# Altium PCB DC_Switch_2_5V.PcbDoc (part 2 of 2)
Units mm, origin at the board's own origin, x right, y up, seen from the top; angles counter-clockwise.
Board outline 119.38 x 91.44 mm, 2 copper layers (Top Layer, Bottom Layer); 24 components, 104 nets, 306 pads, 149 vias.
Unrouted connection lines stored in the file: 1.
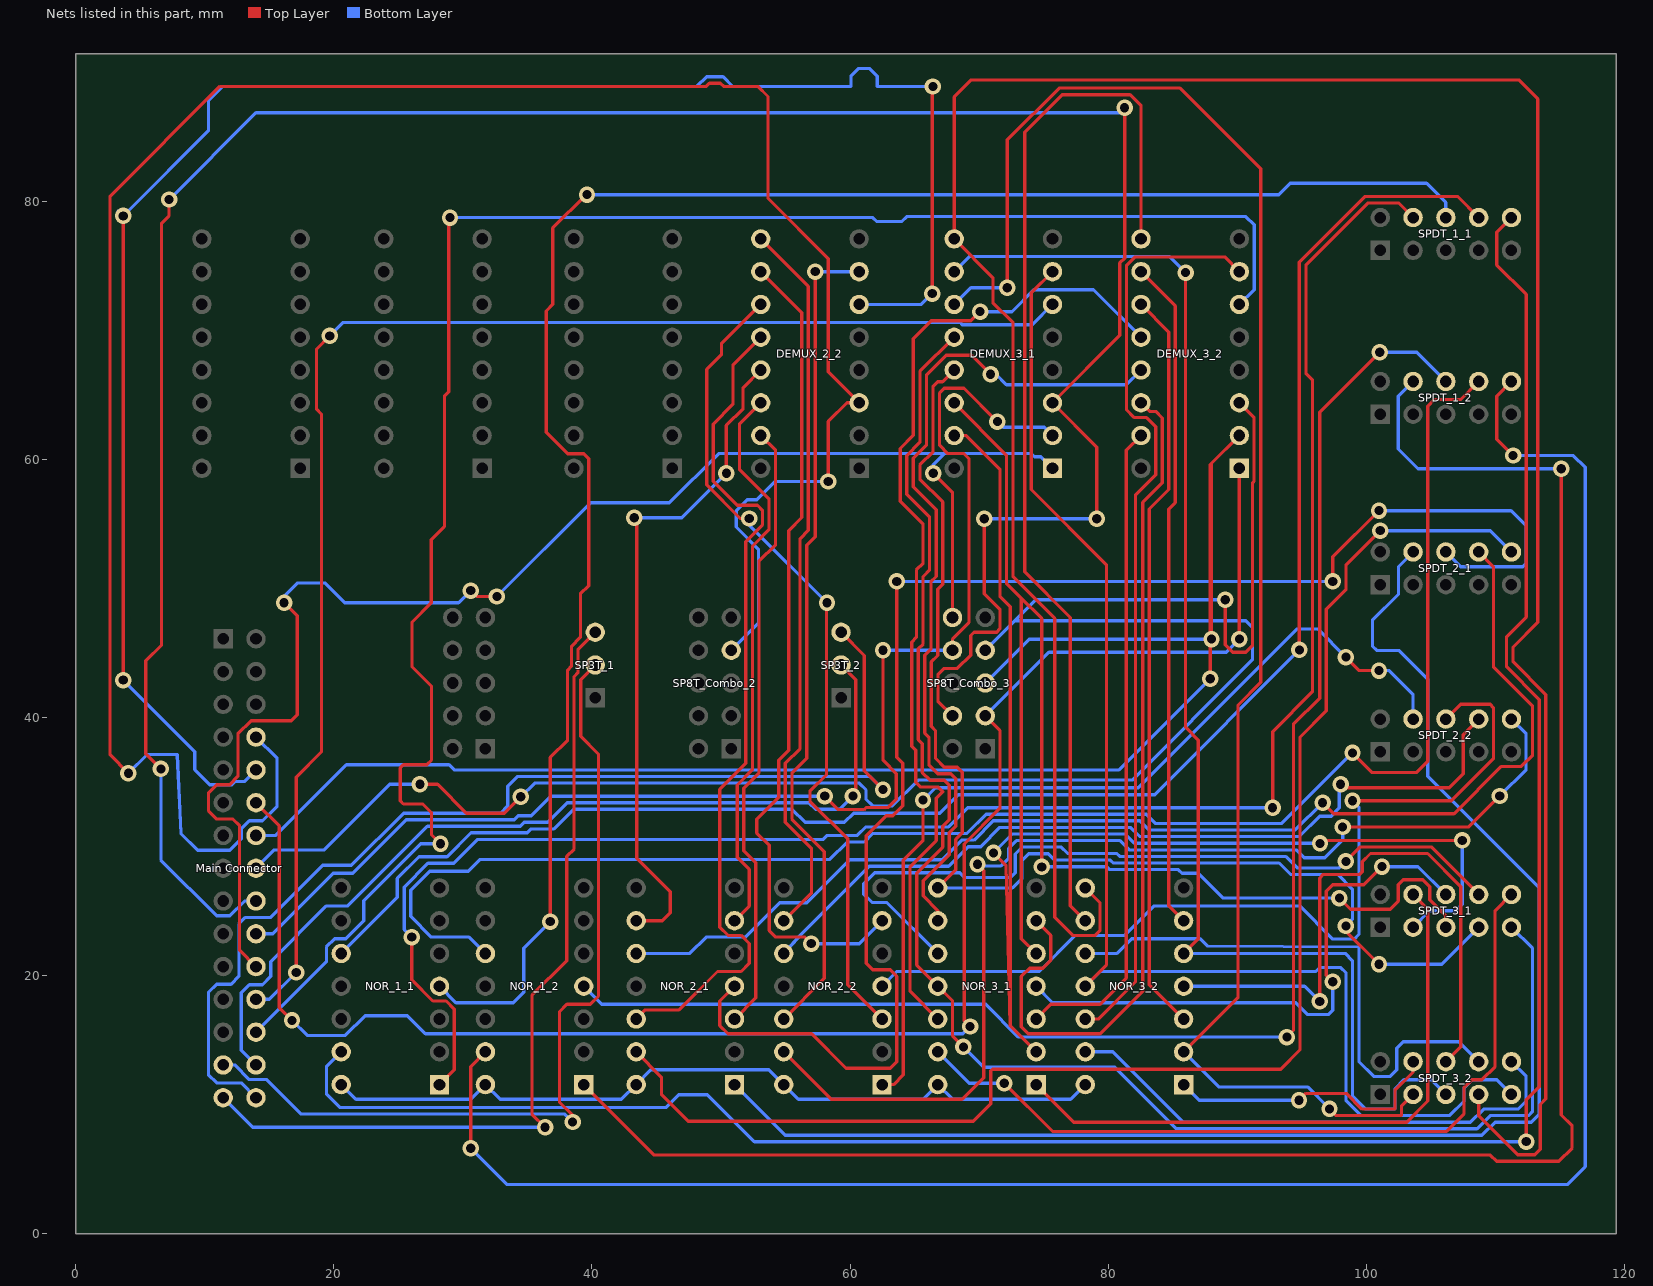
[diagram p2: the nets of this part, all layers, seen from the top]

## Via types
v1: diameter 1.27, hole 0.711, Top Layer to Bottom Layer, 149 vias

## Nets (pads, with @x,y where several pads share a name; then routed paths per layer and width w, separated by ;. In a path a pad name is that pad's centre, name@x,y a point inside that pad or via, vN(x,y) a via of type N, cw(c..) or ccw(c..) an arc to the next point about the centre after c; other vN are vias at no path point) (continued)
NetDEMUX_2_2_3: "Main Connector.19" DEMUX_2_2.3 SP8T_Combo_2.4 | length 181.5
  Top Layer w0.254: v1(4.089,35.687) 2.667,37.109 2.667,80.391 11.176,88.9 48.855,88.9 49.109,89.154 49.951,89.154 50.205,88.9 52.866,88.9 53.645,88.121 53.645,80.239 58.318,75.565 58.318,66.777 DEMUX_2_2.3@60.706,64.389 59.766,64.389 58.318,62.941 v1(58.318,58.293)
  Bottom Layer w0.254: v1(4.089,35.687) 5.537,37.135 7.874,37.135 8.153,31.013 9.449,29.718 11.95,29.718 12.839,30.607 12.839,31.381 13.462,32.004 14.478,32.004 15.609,33.135 15.609,36.842 13.97,38.481 ; SP8T_Combo_2.4@50.8,45.212 52.908,47.32 52.908,53.035 51.181,54.762 51.181,56.007 52.045,56.871 52.781,56.871 54.204,58.293 v1(58.318,58.293)
NetDEMUX_2_2_6: "Main Connector.20" DEMUX_2_2.6 | length 144.8
  Top Layer w0.254: v1(3.683,42.901) v1(3.683,78.867) ; v1(66.37,72.847) v1@66.37,88.9 ; v1@66.37,88.951 v1(66.421,88.9)
  Bottom Layer w0.254: v1(3.683,42.901) 9.22,37.363 9.22,35.966 10.389,34.798 12.089,34.798 12.331,35.04 13.069,35.04 13.97,35.941 ; v1(3.683,78.867) 3.302,79.248 4.064,79.248 10.287,85.471 10.287,87.797 11.39,88.9 48.137,88.9 48.899,89.662 50.161,89.662 50.934,88.889 60.071,88.889 60.071,89.702 60.666,90.297 61.508,90.297 62.103,89.702 62.103,88.9 v1(66.421,88.9) ; DEMUX_2_2.6@60.706,72.009 65.532,72.009 v1(66.37,72.847)
NetDEMUX_2_2_7: DEMUX_2_2.7 NOR_2_2.12 | length 64.4
  Top Layer w0.254: NOR_2_2.12@54.864,16.637 58.014,19.787 58.014,29.616 55.499,32.131 55.499,35.687 56.642,36.83 56.642,53.358 57.302,54.018 v1(57.302,74.549)
  Bottom Layer w0.254: v1(57.302,74.549) DEMUX_2_2.7@60.706,74.549
NetDEMUX_2_2_9: DEMUX_2_2.9 NOR_2_2.9 | length 56.8
  Top Layer w0.254: DEMUX_2_2.9@53.086,77.089 56.769,73.406 56.769,54.501 56.134,53.866 56.134,37.592 54.991,36.449 54.991,31.877 57.023,29.845 57.023,26.416 NOR_2_2.9@54.864,24.257
NetDEMUX_2_2_10: DEMUX_2_2.10 NOR_2_2.6 | length 64.1
  Top Layer w0.254: DEMUX_2_2.10@53.086,74.549 56.261,71.374 56.261,55.499 55.245,54.483 55.245,37.465 54.483,36.703 54.483,33.833 52.781,32.131 52.781,31.051 53.733,30.099 53.733,23.495 54.241,22.987 56.49,22.987 v1(56.998,22.479)
  Bottom Layer w0.254: v1(56.998,22.479) 60.706,22.479 NOR_2_2.6@62.484,24.257
NetDEMUX_2_2_11: DEMUX_2_2.11 NOR_2_2.3 | length 64.2
  Top Layer w0.254: v1(52.197,55.423) 51.505,55.423 48.895,58.032 48.895,66.973 50.038,68.116 50.038,68.961 DEMUX_2_2.11@53.086,72.009 ; v1(58.217,48.895) 58.178,48.856 58.178,35.572 56.896,34.29 56.896,33.528 59.817,30.607 59.817,19.304 NOR_2_2.3@62.484,16.637
  Bottom Layer w0.254: v1(52.197,55.423) 52.197,54.915 v1(58.217,48.895)
NetDEMUX_2_2_12: DEMUX_2_2.12 NOR_2_1.12 | length 66
  Top Layer w0.254: NOR_2_1.12@43.434,16.637 44.137,17.34 46.753,17.34 49.733,20.32 51.562,20.32 52.185,20.943 52.185,22.491 51.562,23.114 50.546,23.114 49.911,23.749 49.911,34.429 51.931,36.449 51.931,53.633 53.213,54.915 53.213,56.058 52.832,56.439 51.257,56.439 49.403,58.293 49.403,62.738 50.927,64.262 50.927,67.31 DEMUX_2_2.12@53.086,69.469
NetDEMUX_2_2_13: DEMUX_2_2.13 NOR_2_1.9 | length 52.3
  Top Layer w0.254: v1(43.282,55.474) 43.485,55.27 43.485,29.104 46.076,26.513 46.076,24.867 45.466,24.257 NOR_2_1.9@43.434,24.257 ; v1(50.419,58.928) 50.419,62.636 51.714,63.932 51.714,65.557 DEMUX_2_2.13@53.086,66.929
  Bottom Layer w0.254: v1(43.282,55.474) 46.965,55.474 v1(50.419,58.928)
NetDEMUX_2_2_14: DEMUX_2_2.14 NOR_2_1.6 | length 43.6
  Top Layer w0.254: NOR_2_1.6@51.054,24.257 52.185,25.388 52.185,28.231 51.257,29.159 51.257,34.771 52.439,35.953 52.439,53.252 53.721,54.534 53.721,56.947 51.435,59.233 51.435,62.738 DEMUX_2_2.14@53.086,64.389
NetDEMUX_2_2_15: DEMUX_2_2.15 NOR_2_1.3 | length 47.8
  Top Layer w0.254: NOR_2_1.3@51.054,16.637 52.693,18.276 52.693,28.739 51.765,29.667 51.765,34.517 52.947,35.699 52.947,52.109 54.229,53.391 54.229,60.706 DEMUX_2_2.15@53.086,61.849
NetDEMUX_3_1_1: "Main Connector.26" DEMUX_3_1.1 SP8T_Combo_3.10 | length 116.6
  Top Layer w0.254: 13.97,20.701 12.7,21.971 12.7,31.623 12.192,32.131 10.922,32.131 10.299,32.754 10.299,34.175 10.922,34.798 11.938,34.798 12.573,35.433 12.573,38.735 13.589,39.751 16.716,39.751 17.17,40.206 17.17,47.879 v1(16.154,48.895) ; v1(30.607,49.835) 31.064,49.378 v1(32.639,49.378) ; v1(66.446,58.928) 67.945,57.429 SP8T_Combo_3.10@67.945,47.752
  Bottom Layer w0.254: v1(16.154,48.895) 16.154,49.403 17.17,50.419 19.33,50.419 20.854,48.895 29.667,48.895 v1(30.607,49.835) ; v1(32.639,49.378) 39.908,56.647 46.01,56.647 49.815,60.452 67.31,60.452 ; v1(66.446,58.928) 66.446,59.588 67.31,60.452 ; DEMUX_3_1.1@75.692,59.309 74.791,60.21 74.295,60.21 74.053,60.452 67.31,60.452
NetDEMUX_3_1_2: "Main Connector.25" DEMUX_3_1.2 SP8T_Combo_3.9 | length 104.7
  Top Layer w0.254: v1(58.039,33.909) 59.08,32.868 61.089,32.868 61.241,33.02 62.941,33.02 63.576,33.655 63.576,35.662 62.56,36.678 v1(62.56,45.212) ; SP8T_Combo_3.9@67.945,45.212 67.945,46.089 69.215,47.359 69.215,60.071 68.834,60.452 67.576,60.452 66.941,61.087 66.941,65.151 67.31,65.52 68.834,65.52 v1(71.425,62.929)
  Bottom Layer w0.254: 13.97,23.241 15.265,23.241 19.952,27.928 21.472,27.928 25.624,32.08 33.985,32.08 34.29,32.385 35.293,32.385 36.817,33.909 v1(58.039,33.909) ; v1(62.56,45.212) SP8T_Combo_3.9@67.945,45.212 ; v1(71.425,62.929) 71.87,62.484 75.057,62.484 DEMUX_3_1.2@75.692,61.849
NetDEMUX_3_1_3: "Main Connector.24" DEMUX_3_1.3 SP8T_Combo_3.7 | length 203.2
  Top Layer w0.254: v1(6.604,36.017) 5.436,37.186 5.436,44.4 6.655,45.619 6.655,78.308 7.239,78.892 v1(7.239,80.137) ; SP8T_Combo_3.7@67.945,40.132 66.814,41.263 66.814,43.307 67.31,43.803 68.326,43.803 69.354,44.831 69.354,46.355 69.608,46.609 71.362,46.609 71.616,46.863 71.616,48.387 70.409,49.594 v1(70.409,55.397) ; v1(79.121,55.397) 79.121,60.96 DEMUX_3_1.3@75.692,64.389 80.911,69.608 80.911,75.228 81.28,75.597 v1(81.28,87.249)
  Bottom Layer w0.254: v1(6.604,36.017) 6.604,28.956 10.922,24.638 11.938,24.638 13.081,25.781 13.97,25.781 ; v1(7.239,80.137) 13.97,86.868 80.899,86.868 v1(81.28,87.249) ; v1(70.409,55.397) v1(79.121,55.397)
NetDEMUX_3_1_6: "Main Connector.27" DEMUX_3_1.6 | length 111.9
  Top Layer w0.254: v1(17.094,20.244) 17.094,35.382 19.05,37.338 19.05,63.5 18.669,63.881 18.669,68.555 v1(19.685,69.571)
  Bottom Layer w0.254: 13.97,18.161 15.011,18.161 v1(17.094,20.244) ; v1(19.685,69.571) 20.726,70.612 68.529,70.612 68.707,70.434 74.117,70.434 DEMUX_3_1.6@75.692,72.009
NetDEMUX_3_1_7: DEMUX_3_1.7 NOR_3_2.11 SPDT_3_2.5 | length 105.5
  Top Layer w0.254: DEMUX_3_1.7@75.692,74.549 74.053,72.91 74.053,57.67 79.871,51.852 79.871,20.816 NOR_3_2.11@78.232,19.177
  Bottom Layer w0.254: NOR_3_2.11@78.232,19.177 79.375,20.32 96.088,20.32 96.393,20.625 98.044,20.625 98.425,20.244 98.425,10.352 99.621,9.156 106.45,9.156 107.581,10.287 107.581,11.303 108.204,11.926 110.121,11.926 SPDT_3_2.5@111.252,10.795
NetDEMUX_3_1_9: DEMUX_3_1.9 NOR_3_2.8 SPDT_3_2.4 | length 212.4
  Top Layer w0.254: NOR_3_2.8@78.232,26.797 79.363,25.666 79.363,23.483 78.994,23.114 77.267,23.114 75.87,24.511 75.87,47.677 72.632,50.915 72.632,70.593 71.078,72.147 71.078,74.083 DEMUX_3_1.9@68.072,77.089 68.072,88.087 69.393,89.408 111.811,89.408 113.284,87.935 113.284,47.371 111.379,45.466 111.379,44.311 113.907,41.783 113.907,10.446 113.475,10.014 113.475,6.541 113.055,6.121 111.735,6.121 108.712,9.144 SPDT_3_2.4@108.712,10.795
NetDEMUX_3_1_10: DEMUX_3_1.10 NOR_3_2.5 SPDT_3_2.3 | length 106.4
  Top Layer w0.254: NOR_3_2.5@85.852,21.717 86.995,22.86 86.995,38.243 86.001,39.237 v1(86.001,74.476)
  Bottom Layer w0.254: DEMUX_3_1.10@68.072,74.549 69.24,75.717 84.76,75.717 v1(86.001,74.476) ; NOR_3_2.5@85.852,21.717 98.374,21.717 98.933,21.158 98.933,10.68 99.949,9.664 102.235,9.664 102.235,11.252 102.921,11.938 105.029,11.938 SPDT_3_2.3@106.172,10.795
NetDEMUX_3_1_11: DEMUX_3_1.11 NOR_3_2.2 SPDT_3_2.2 | length 131.8
  Top Layer w0.254: v1(72.187,73.304) 72.187,84.76 76.2,88.773 85.573,88.773 91.821,82.525 91.821,42.723 90.068,40.97 90.068,18.313 NOR_3_2.2@85.852,14.097 ; v1(97.155,9.677) 97.676,9.156 102.731,9.156 102.731,9.894 SPDT_3_2.2@103.632,10.795
  Bottom Layer w0.254: DEMUX_3_1.11@68.072,72.009 69.367,73.304 v1(72.187,73.304) ; NOR_3_2.2@85.852,14.097 88.572,11.377 95.455,11.377 v1(97.155,9.677)
NetDEMUX_3_1_12: DEMUX_3_1.12 NOR_3_1.11 SPDT_3_1.5 | length 124
  Top Layer w0.254: DEMUX_3_1.12@68.072,69.469 65.417,66.814 65.417,61.318 64.401,60.302 64.401,57.3 66.167,55.534 66.167,51.435 65.659,50.927 65.659,45.696 65.29,45.327 65.29,38.291 65.608,37.973 65.608,35.738 66.214,35.132 67.31,35.132 67.691,34.751 67.691,32.08 67.183,31.572 67.183,29.96 65.163,27.94 65.163,20.816 NOR_3_1.11@66.802,19.177 67.945,18.034 67.945,15.316 v1(68.783,14.478)
  Bottom Layer w0.254: v1(68.783,14.478) 70.358,12.903 80.518,12.903 85.281,8.14 108.585,8.14 109.601,9.156 112.573,9.156 112.891,9.474 112.891,22.11 SPDT_3_1.5@111.252,23.749
NetDEMUX_3_1_13: DEMUX_3_1.13 NOR_3_1.8 SPDT_3_1.4 | length 96.1
  Top Layer w0.254: NOR_3_1.8@66.802,26.797 68.199,28.194 68.199,30.556 68.707,31.064 68.707,35.767 68.326,36.148 67.31,36.148 66.624,36.834 66.624,38.989 66.306,39.307 66.306,44.311 66.802,44.807 66.802,49.936 67.183,50.317 67.183,56.706 65.417,58.472 65.417,59.575 66.433,60.591 66.433,65.659 66.802,66.028 67.171,66.028 DEMUX_3_1.13@68.072,66.929 ; v1(98.425,23.851) 98.425,23.444 v1(100.99,20.879)
  Bottom Layer w0.254: NOR_3_1.8@66.802,26.797 72.593,26.797 73.304,27.508 73.304,28.919 73.838,29.452 75.374,29.452 75.87,28.956 80.175,28.956 80.403,28.727 93.243,28.727 94.132,27.838 97.79,27.838 98.933,26.695 98.933,24.359 v1(98.425,23.851) ; v1(100.99,20.879) 105.842,20.879 SPDT_3_1.4@108.712,23.749
NetDEMUX_3_1_14: DEMUX_3_1.14 NOR_3_1.5 SPDT_3_1.3 | length 103.8
  Top Layer w0.254: DEMUX_3_1.14@68.072,64.389 72.124,60.337 72.124,50.407 73.279,49.252 ; NOR_3_1.5@74.422,21.717 73.279,22.86 73.279,49.252 ; v1(74.854,28.423) 74.854,47.677 73.279,49.252 ; v1(97.917,26.01) 98.781,25.146 101.854,25.146 102.489,25.781 102.489,27.051 102.87,27.432 104.394,27.432 104.927,26.899 104.927,25.883 106.172,24.638 SPDT_3_1.3@106.172,23.749
  Bottom Layer w0.254: v1(74.854,28.423) 74.879,28.448 79.883,28.448 80.112,28.219 85.446,28.219 85.725,27.94 86.995,27.94 88.925,26.01 v1(97.917,26.01)
NetDEMUX_3_1_15: DEMUX_3_1.15 NOR_3_1.2 SPDT_3_1.2 | length 111.6
  Top Layer w0.254: DEMUX_3_1.15@68.072,61.849 69.009,61.849 71.616,59.242 71.616,49.391 72.415,48.592 72.415,16.104 ; v1(71.12,29.515) 72.085,28.55 72.415,16.104 ; NOR_3_1.2@74.422,14.097 72.415,16.104 ; v1(96.418,30.251) 96.647,30.48 v1(107.442,30.48)
  Bottom Layer w0.254: v1(71.12,29.515) 72.581,30.976 81.317,30.976 82.042,30.251 v1(96.418,30.251) ; SPDT_3_1.2@103.632,23.749 104.902,25.019 106.934,25.019 107.442,25.527 v1(107.442,30.48)
NetDEMUX_3_2_1: "Main Connector.21" DEMUX_3_2.1 SP8T_Combo_3.2 | length 133.7
  Top Layer w0.254: 13.97,33.401 15.773,31.598 15.773,17.526 v1(16.764,16.535) ; v1(69.303,16.059) 68.859,16.503 68.859,30.201 71.616,32.957 71.616,39.001 SP8T_Combo_3.2@70.485,40.132 ; v1(90.17,46.076) DEMUX_3_2.1@90.17,59.309
  Bottom Layer w0.254: v1(16.764,16.535) 17.932,15.367 20.904,15.367 22.428,16.891 25.705,16.891 27.102,15.494 68.738,15.494 v1(69.303,16.059) ; SP8T_Combo_3.2@70.485,40.132 75.413,45.06 89.154,45.06 v1(90.17,46.076)
NetDEMUX_3_2_2: "Main Connector.22" DEMUX_3_2.2 SP8T_Combo_3.3 | length 131.6
  Top Layer w0.254: v1(87.909,43.002) 87.909,59.588 88.011,59.69 ; v1(88.011,46.076) 88.011,59.69 ; DEMUX_3_2.2@90.17,61.849 88.011,59.69
  Bottom Layer w0.254: 13.97,30.861 15.494,30.861 20.98,36.347 28.931,36.347 29.338,35.941 80.848,35.941 v1(87.909,43.002) ; SP8T_Combo_3.3@70.485,42.672 73.889,46.076 v1(88.011,46.076)
NetDEMUX_3_2_3: "Main Connector.23" DEMUX_3_2.3 SP8T_Combo_3.4 | length 154.4
  Top Layer w0.254: v1(26.67,34.823) 28.042,34.823 30.277,32.588 33.223,32.588 v1(34.493,33.858) ; v1(89.078,49.124) 89.078,45.644 89.662,45.06 90.678,45.06 91.186,45.568 91.186,58.166 91.301,58.281 91.301,63.258 DEMUX_3_2.3@90.17,64.389
  Bottom Layer w0.254: 13.97,28.321 15.389,29.74 19.253,29.74 24.337,34.823 v1(26.67,34.823) ; v1(34.493,33.858) 35.56,34.925 60.706,34.925 61.241,34.39 61.241,33.655 61.749,33.147 63.271,33.147 65.278,35.154 81.864,35.154 91.186,44.475 91.186,46.99 90.678,47.498 72.771,47.498 ; SP8T_Combo_3.4@70.485,45.212 72.771,47.498 ; v1(89.078,49.124) 74.397,49.124 72.771,47.498
NetDEMUX_3_2_6: "Main Connector.28" DEMUX_3_2.6 | length 146
  Top Layer w0.254: v1(28.27,30.226) 27.571,30.925 27.571,32.639 26.911,33.299 25.4,33.299 25.146,33.553 25.146,36.093 25.4,36.347 27.215,36.347 27.571,36.703 27.571,42.431 26.06,43.942 26.06,47.383 27.559,48.881 27.559,53.781 28.575,54.797 28.575,64.897 28.905,65.227 28.905,78.638 v1(29.007,78.74)
  Bottom Layer w0.254: 13.97,15.621 19.431,21.082 19.431,22.225 20.066,22.86 20.93,22.86 22.323,24.253 22.323,25.803 26.746,30.226 v1(28.27,30.226) ; v1(29.007,78.74) 61.773,78.74 62.078,78.435 64.008,78.435 64.389,78.816 90.678,78.816 91.313,78.181 91.313,73.152 DEMUX_3_2.6@90.17,72.009
NetDEMUX_3_2_7: DEMUX_3_2.7 NOR_3_2.12 | length 72.2
  Top Layer w0.254: NOR_3_2.12@78.232,16.637 79.248,16.637 82.118,19.507 82.118,57.238 83.681,58.801 83.681,62.547 82.982,63.246 82.042,63.246 81.419,63.869 81.419,69.398 81.419,75.018 82.094,75.692 89.027,75.692 DEMUX_3_2.7@90.17,74.549
NetDEMUX_3_2_9: DEMUX_3_2.9 NOR_3_2.9 | length 83.9
  Top Layer w0.254: NOR_3_2.9@78.232,24.257 77.064,25.425 77.064,47.752 73.533,51.283 73.533,85.344 76.454,88.265 81.701,88.265 82.55,87.416 DEMUX_3_2.9@82.55,77.089
NetDEMUX_3_2_10: DEMUX_3_2.10 NOR_3_2.6 | length 52.1
  Top Layer w0.254: DEMUX_3_2.10@82.55,74.549 85.205,71.894 85.205,56.654 84.697,56.146 84.697,25.412 NOR_3_2.6@85.852,24.257
NetDEMUX_3_2_11: DEMUX_3_2.11 NOR_3_2.3 | length 58
  Top Layer w0.254: DEMUX_3_2.11@82.55,72.009 84.697,69.862 84.697,57.67 83.185,56.158 83.185,19.304 NOR_3_2.3@85.852,16.637
NetDEMUX_3_2_12: DEMUX_3_2.12 NOR_3_1.12 | length 78.7
  Top Layer w0.254: NOR_3_1.12@66.802,16.637 64.655,18.784 64.655,28.448 66.675,30.468 66.675,33.735 67.183,34.243 66.802,34.624 65.452,34.624 65.1,34.976 65.1,37.465 64.782,37.783 64.782,45.835 65.151,46.204 65.151,51.435 65.659,51.943 65.659,54.991 63.893,56.757 63.893,60.845 64.909,61.861 64.909,69.354 66.294,70.739 69.367,70.739 v1(70.079,71.45)
  Bottom Layer w0.254: v1(70.079,71.45) 72.553,71.45 74.254,73.152 78.867,73.152 DEMUX_3_2.12@82.55,69.469
NetDEMUX_3_2_13: DEMUX_3_2.13 NOR_3_1.9 | length 65.6
  Top Layer w0.254: NOR_3_1.9@66.802,24.257 66.802,25.044 65.671,26.175 65.671,27.342 67.691,29.362 67.691,31.064 68.199,31.572 68.199,35.259 67.818,35.64 66.802,35.64 66.116,36.326 66.116,38.481 65.798,38.799 65.798,44.819 66.269,45.29 66.269,50.521 66.675,50.927 66.675,56.109 64.909,57.875 64.909,60.083 65.925,61.099 65.925,66.535 67.462,68.072 69.418,68.072 v1(70.897,66.594)
  Bottom Layer w0.254: v1(70.897,66.594) 71.313,66.594 72.124,65.783 81.404,65.783 DEMUX_3_2.13@82.55,66.929
NetDEMUX_3_2_14: DEMUX_3_2.14 NOR_3_1.6 | length 68.4
  Top Layer w0.254: NOR_3_1.6@74.422,24.257 75.565,23.114 75.565,21.209 74.93,20.574 73.914,20.574 73.279,19.939 73.279,16.027 73.812,15.494 79.375,15.494 82.677,18.796 82.677,56.666 84.189,58.178 84.189,63.21 83.681,63.718 83.221,63.718 DEMUX_3_2.14@82.55,64.389
NetDEMUX_3_2_15: DEMUX_3_2.15 NOR_3_1.3 | length 50.8
  Top Layer w0.254: NOR_3_1.3@74.422,16.637 75.565,17.78 79.375,17.78 81.407,19.812 81.407,60.706 DEMUX_3_2.15@82.55,61.849
"NetMain Connector_14": "Main Connector.14" SP3T_1.2 | length 68.1
  Top Layer w0.254: v1(38.506,8.661) 38.506,9.169 37.49,10.185 37.49,17.207 38.063,17.78 39.878,17.78 40.513,18.415 40.513,37.172 39.128,38.557 39.128,42.938 SP3T_1.2@40.259,44.069
  Bottom Layer w0.254: 11.43,13.081 12.319,13.081 13.45,11.95 14.796,11.95 17.475,9.271 37.897,9.271 v1(38.506,8.661)
"NetMain Connector_15": "Main Connector.15" SP3T_1.3 | length 66.7
  Top Layer w0.254: v1(36.373,8.255) 35.357,9.271 35.357,18.466 38.049,21.158 38.049,29.235 38.62,29.806 38.62,43.18 38.92,43.48 38.92,45.27 SP3T_1.3@40.259,46.609
  Bottom Layer w0.254: 11.43,10.541 13.716,8.255 v1(36.373,8.255)
"NetMain Connector_29": "Main Connector.29" SP3T_2.2 | length 71.6
  Top Layer w0.254: SP3T_2.2@59.309,44.069 60.452,42.926 60.452,34.138 v1(60.223,33.909)
  Bottom Layer w0.254: 13.97,13.081 12.827,14.224 12.827,18.669 13.462,19.304 14.478,19.304 15.113,19.939 15.113,21.082 19.431,25.4 21.082,25.4 27.254,31.572 34.442,31.572 34.747,31.877 36.576,31.877 38.1,33.401 56.82,33.401 57.328,32.893 59.207,32.893 v1(60.223,33.909)
"NetMain Connector_30": "Main Connector.30" SP3T_2.3 | length 87.2
  Top Layer w0.254: SP3T_2.3@59.309,46.609 61.112,44.806 61.112,35.865 v1(62.56,34.417)
  Bottom Layer w0.254: 13.97,10.541 12.827,11.684 10.922,11.684 10.287,12.319 10.287,18.694 10.922,19.329 12.04,19.329 12.649,19.939 12.649,24.003 13.157,24.511 15.113,24.511 19.152,28.55 21.369,28.55 25.407,32.588 32.918,32.588 33.477,33.147 33.477,34.671 34.239,35.433 61.544,35.433 v1(62.56,34.417)
NetNOR_1_1_1: NOR_1_1.1 SPDT_1_1.7 | length 142.1
  Top Layer w0.254: v1(26.035,22.987) 26.035,19.685 27.686,18.034 28.702,18.034 29.337,17.399 29.337,12.7 NOR_1_1.1@28.194,11.557 ; v1(92.749,33.008) 92.749,38.907 95.834,41.992 95.834,66.167 95.326,66.675 95.326,75.057 100.14,79.871 102.501,79.871 SPDT_1_1.7@103.632,78.74
  Bottom Layer w0.254: v1(26.035,22.987) 25.451,23.571 25.451,26.856 27.297,28.702 29.286,28.702 31.14,30.556 57.937,30.556 58.242,30.861 60.579,30.861 61.239,31.521 67.64,31.521 69.127,33.008 v1(92.749,33.008)
NetNOR_1_1_4: NOR_1_1.4 SPDT_1_1.8 | length 143.4
  Top Layer w0.254: v1(36.779,24.186) 36.779,36.906 38.112,38.239 38.112,43.676 38.412,43.976 38.412,45.5 39.116,46.204 39.116,49.581 39.751,50.216 39.751,60.059 39.37,60.44 38.112,60.44 36.461,62.091 36.461,71.501 36.969,72.009 36.969,77.939 39.548,80.518 v1(39.624,80.518)
  Bottom Layer w0.254: NOR_1_1.4@28.194,19.177 29.464,17.907 33.909,17.907 34.716,18.714 34.716,22.123 v1(36.779,24.186) ; v1(39.624,80.518) 93.219,80.518 94.108,81.407 104.674,81.407 106.172,79.909 SPDT_1_1.8@106.172,78.74
NetNOR_1_1_10: NOR_1_1.10 SPDT_1_1.9 | length 132.4
  Top Layer w0.254: v1(94.818,45.237) 94.818,75.286 99.912,80.379 107.073,80.379 SPDT_1_1.9@108.712,78.74
  Bottom Layer w0.254: NOR_1_1.10@20.574,21.717 24.926,26.069 24.926,27.534 26.602,29.21 28.778,29.21 30.632,31.064 35.001,31.064 35.306,31.369 37.071,31.369 38.595,32.893 55.499,32.893 56.515,31.877 59.563,31.877 60.274,32.588 66.954,32.588 68.39,34.024 83.605,34.024 v1(94.818,45.237)
NetNOR_1_1_13: NOR_1_1.13 SPDT_1_1.10 | length 174.2
  Top Layer w0.254: SPDT_1_1.10@111.252,78.74 110.121,77.609 110.121,75.057 112.395,72.783 112.395,47.783 110.871,46.259 110.871,43.92 113.399,41.392 113.399,11.386 112.395,10.382 v1(112.395,7.137)
  Bottom Layer w0.254: NOR_1_1.13@20.574,14.097 19.431,12.954 19.431,10.853 20.505,9.779 45.733,9.779 46.723,10.77 48.946,10.77 52.591,7.124 112.382,7.124 v1(112.395,7.137)
NetNOR_1_2_1: NOR_1_2.1 SPDT_1_2.7 | length 151.4
  Top Layer w0.254: NOR_1_2.1@39.37,11.557 44.831,6.096 109.626,6.096 110.109,5.613 114.923,5.613 115.951,6.641 115.951,8.363 115.113,9.201 v1(115.113,59.284)
  Bottom Layer w0.254: SPDT_1_2.7@103.632,66.04 102.489,64.897 102.489,60.808 104.013,59.284 v1(115.113,59.284)
NetNOR_1_2_4: NOR_1_2.4 SPDT_1_2.8 | length 118.2
  Top Layer w0.254: v1(93.853,15.24) 94.361,15.748 94.361,39.472 96.393,41.504 96.393,63.652 v1(101.041,68.301)
  Bottom Layer w0.254: NOR_1_2.4@39.37,19.177 40.767,17.78 70.51,17.78 73.05,15.24 v1(93.853,15.24) ; v1(101.041,68.301) 103.911,68.301 SPDT_1_2.8@106.172,66.04
NetNOR_1_2_10: NOR_1_2.10 SPDT_1_2.9 | length 126.1
  Top Layer w0.254: v1(98.933,37.262) 100.457,35.738 103.886,35.738 104.775,36.627 104.775,64.135 105.283,64.643 107.315,64.643 SPDT_1_2.9@108.712,66.04
  Bottom Layer w0.254: NOR_1_2.10@31.75,21.717 30.48,22.987 27.559,22.987 25.959,24.587 25.959,26.619 27.42,28.081 30.415,28.081 31.341,29.007 58.445,29.007 59.792,30.353 61.087,30.353 61.747,31.013 69.062,31.013 70.549,32.5 82.955,32.5 83.659,31.796 93.467,31.796 v1(98.933,37.262)
NetNOR_1_2_13: NOR_1_2.13 SPDT_1_2.10 | length 162.9
  Top Layer w0.254: v1(30.607,6.629) 30.607,12.954 NOR_1_2.13@31.75,14.097 ; SPDT_1_2.10@111.252,66.04 110.109,64.897 110.109,61.57 v1(111.379,60.3)
  Bottom Layer w0.254: v1(30.607,6.629) 33.426,3.81 115.57,3.81 116.967,5.207 116.967,59.385 116.053,60.3 v1(111.379,60.3)
NetNOR_2_1_1: NOR_2_1.1 SPDT_2_1.7 | length 115.9
  Bottom Layer w0.254: NOR_2_1.1@51.054,11.557 54.979,7.632 108.966,7.632 109.982,8.648 112.788,8.648 113.411,9.271 113.411,26.822 104.775,35.458 104.775,42.977 102.565,45.187 100.838,45.187 100.482,45.542 100.482,47.535 102.501,49.554 102.501,51.701 SPDT_2_1.7@103.632,52.832
NetNOR_2_1_4: NOR_2_1.4 SPDT_2_1.8 | length 121.8
  Top Layer w0.254: NOR_2_1.4@51.054,19.177 49.911,18.034 49.911,16.129 50.546,15.494 57.023,15.494 59.69,12.827 63.119,12.827 63.627,13.335 63.627,19.939 63.119,20.447 61.773,20.447 61.265,20.955 61.265,30.836 62.814,32.385 63.322,32.385 64.084,33.147 64.084,36.449 63.627,36.906 v1(63.627,50.546) ; v1(97.409,50.546) 97.409,52.451 v1(100.99,56.032)
  Bottom Layer w0.254: v1(63.627,50.546) v1(97.409,50.546) ; v1(100.99,56.032) 111.224,56.032 112.395,54.861 112.395,51.943 112.141,51.689 107.315,51.689 SPDT_2_1.8@106.172,52.832
NetNOR_2_1_10: NOR_2_1.10 SPDT_2_1.9 | length 94.6
  Top Layer w0.254: v1(96.622,33.401) 97.485,32.537 106.807,32.537 110.477,36.207 112.014,36.207 112.891,37.084 112.891,40.884 109.855,43.92 109.855,51.689 SPDT_2_1.9@108.712,52.832
  Bottom Layer w0.254: NOR_2_1.10@43.434,21.717 47.574,21.717 48.844,22.987 51.892,22.987 54.559,25.654 56.656,25.654 59.984,28.981 67.132,28.981 68.656,30.505 69.616,30.505 71.103,31.992 82.447,31.992 83.151,31.288 94.509,31.288 v1(96.622,33.401)
NetNOR_2_1_13: NOR_2_1.13 SPDT_2_1.10 | length 111.9
  Top Layer w0.254: NOR_2_1.13@43.434,14.097 45.39,12.141 45.39,10.795 47.458,8.727 69.56,8.727 70.917,10.084 70.917,12.624 71.044,12.751 93.37,12.751 94.869,14.249 94.869,38.481 96.901,40.513 96.901,48.387 98.425,49.911 98.425,51.816 v1(101.092,54.483)
  Bottom Layer w0.254: v1(101.092,54.483) 109.601,54.483 SPDT_2_1.10@111.252,52.832
NetNOR_2_2_1: NOR_2_2.1 SPDT_2_2.7 | length 71.4
  Top Layer w0.254: NOR_2_2.1@62.484,11.557 63.373,11.557 64.135,12.319 64.135,28.956 65.659,30.48 v1(65.659,33.604) ; v1(98.425,44.679) 99.466,43.637 v1(100.99,43.637)
  Bottom Layer w0.254: v1(65.659,33.604) 66.624,34.569 82.349,34.569 94.643,46.863 96.241,46.863 v1(98.425,44.679) ; v1(100.99,43.637) 101.778,43.637 103.632,41.783 SPDT_2_2.7@103.632,39.878
NetNOR_2_2_4: NOR_2_2.4 SPDT_2_2.8 | length 71.8
  Top Layer w0.254: v1(98.933,33.553) 106.604,33.553 109.855,36.805 109.855,40.767 109.601,41.021 107.315,41.021 SPDT_2_2.8@106.172,39.878
  Bottom Layer w0.254: NOR_2_2.4@62.484,19.177 63.627,20.32 74.676,20.32 77.47,23.114 81.28,23.114 83.566,25.4 94.844,25.4 97.409,22.835 99.06,22.835 99.441,23.216 99.441,33.045 v1(98.933,33.553)
NetNOR_2_2_10: NOR_2_2.10 SPDT_2_2.9 | length 65
  Top Layer w0.254: v1(98.019,34.823) 98.273,34.569 106.439,34.569 107.51,35.64 107.51,38.676 SPDT_2_2.9@108.712,39.878
  Bottom Layer w0.254: NOR_2_2.10@54.864,21.717 56.007,22.987 61.493,28.473 67.637,28.473 69.161,29.997 70.124,29.997 71.611,31.484 81.732,31.484 82.435,30.78 94.818,30.78 96.398,32.36 97.282,32.36 97.917,32.995 97.917,34.722 v1(98.019,34.823)
NetNOR_2_2_13: NOR_2_2.13 SPDT_2_2.10 | length 86.6
  Top Layer w0.254: NOR_2_2.13@54.864,14.097 58.547,10.414 68.682,10.414 70.358,12.09 70.358,28.143 v1(69.875,28.626) ; v1(98.171,31.521) 107.95,31.521 v1(110.351,33.922)
  Bottom Layer w0.254: v1(69.875,28.626) 70.002,28.499 71.704,28.499 72.288,29.083 72.288,29.858 72.898,30.468 80.923,30.468 81.648,29.743 94.59,29.743 95.199,29.134 96.789,29.134 98.171,30.516 v1(98.171,31.521) ; v1(110.351,33.922) 112.383,35.954 112.383,38.747 SPDT_2_2.10@111.252,39.878
NetNOR_3_1_1: NOR_3_1.1 SPDT_3_1.7 | length 48.7
  Top Layer w0.254: NOR_3_1.1@74.422,11.557 77.331,8.648 103.136,8.648 104.775,10.287 104.775,25.146 SPDT_3_1.7@103.632,26.289
NetNOR_3_1_4: NOR_3_1.4 SPDT_3_1.8 | length 44.4
  Top Layer w0.254: v1(97.409,19.533) 96.901,20.041 96.901,26.543 97.409,27.051 99.822,27.051 v1(101.219,28.448)
  Bottom Layer w0.254: NOR_3_1.4@74.422,19.177 75.692,17.907 94.533,17.907 95.453,16.987 97.073,16.987 97.409,17.323 v1(97.409,19.533) ; v1(101.219,28.448) 104.013,28.448 SPDT_3_1.8@106.172,26.289
NetNOR_3_1_10: NOR_3_1.10 SPDT_3_1.9 | length 61.3
  Top Layer w0.254: v1(98.425,28.854) 99.543,29.972 105.029,29.972 SPDT_3_1.9@108.712,26.289
  Bottom Layer w0.254: NOR_3_1.10@66.802,21.717 62.853,25.666 61.722,25.666 61.043,26.345 61.043,27.084 61.925,27.965 68.504,27.965 68.859,27.61 72.441,27.61 72.796,27.965 72.796,29.427 73.33,29.96 76.378,29.96 76.874,29.464 80.683,29.464 80.911,29.235 93.751,29.235 94.64,28.346 97.917,28.346 v1(98.425,28.854)
NetNOR_3_1_13: NOR_3_1.13 SPDT_3_1.10 | length 62.9
  Top Layer w0.254: v1(71.958,11.659) 75.692,7.925 106.223,7.925 107.569,9.271 107.569,11.303 108.204,11.938 108.966,11.938 109.982,12.954 109.982,25.019 SPDT_3_1.10@111.252,26.289
  Bottom Layer w0.254: NOR_3_1.13@66.802,14.097 69.24,11.659 v1(71.958,11.659)
NetNOR_3_2_1: NOR_3_2.1 SPDT_3_2.7 | length 21.9
  Top Layer w0.254: v1(94.793,10.338) 95.326,10.871 98.462,10.871 99.67,9.664 102.223,9.664 102.223,11.125 103.632,12.534 SPDT_3_2.7@103.632,13.335
  Bottom Layer w0.254: NOR_3_2.1@85.852,11.557 87.071,10.338 v1(94.793,10.338)
NetNOR_3_2_4: NOR_3_2.4 SPDT_3_2.8 | length 47.8
  Top Layer w0.254: v1(96.393,18.009) 96.393,27.559 96.672,27.838 99.492,27.838 99.695,28.042 99.695,28.829 100.33,29.464 104.75,29.464 107.315,26.899 107.315,14.478 SPDT_3_2.8@106.172,13.335
  Bottom Layer w0.254: NOR_3_2.4@85.852,19.177 95.225,19.177 v1(96.393,18.009)
NetNOR_3_2_10: NOR_3_2.10 SPDT_3_2.9 | length 43.3
  Bottom Layer w0.254: NOR_3_2.10@78.232,21.717 80.693,21.717 81.836,22.86 87.122,22.86 87.681,22.301 99.441,22.225 99.441,13.335 100.584,12.192 101.854,12.192 102.362,12.7 102.362,14.376 102.87,14.884 107.163,14.884 SPDT_3_2.9@108.712,13.335
NetNOR_3_2_13: NOR_3_2.13 SPDT_3_2.10 | length 40.6
  Bottom Layer w0.254: NOR_3_2.13@78.232,14.097 80.366,14.097 85.815,8.648 108.077,8.648 109.093,9.664 111.76,9.664 112.383,10.287 112.383,12.204 SPDT_3_2.10@111.252,13.335
VCC: NOR_1_1.14 NOR_1_2.14 NOR_2_1.14 NOR_2_2.14 NOR_3_1.14 NOR_3_2.14 | length 62.4
  Bottom Layer w0.254: NOR_1_1.14@20.574,11.557 21.717,10.414 30.607,10.414 NOR_1_2.14@31.75,11.557 32.893,10.414 42.291,10.414 NOR_2_1.14@43.434,11.557 44.577,12.7 53.721,12.7 NOR_2_2.14@54.864,11.557 56.007,10.414 65.659,10.414 NOR_3_1.14@66.802,11.557 67.945,10.414 77.089,10.414 NOR_3_2.14@78.232,11.557

## Silkscreen, mask and mechanical layers (free items; w line width, h text height)
Top Overlay:
  text "Designed by Edinam Tettevi" at 4.191,85.344 h1.52

## Text inside footprints (layer, text, board x,y; h text height)
"Main Connector": Top Overlay "30" at 13.462,9.017 h1.27 r270; Top Overlay "15" at 10.922,9.017 h1.27 r270; Top Overlay "1" at 10.922,48.641 h1.27 r270; Top Overlay "16" at 13.462,49.657 h1.27 r270
SP8T_Combo_1: Top Overlay "6" at 29.718,35.052 h1.27 r90; Top Overlay "10" at 29.718,49.276 h1.27 r90; Top Overlay "5" at 32.258,49.276 h1.27 r90; Top Overlay "1" at 32.258,35.052 h1.27 r90
SP8T_Combo_2: Top Overlay "6" at 48.768,35.052 h1.27 r90; Top Overlay "10" at 48.768,49.276 h1.27 r90; Top Overlay "5" at 51.308,49.276 h1.27 r90; Top Overlay "1" at 51.308,35.052 h1.27 r90
SP8T_Combo_3: Top Overlay "6" at 68.453,35.052 h1.27 r90; Top Overlay "10" at 68.453,49.276 h1.27 r90; Top Overlay "5" at 70.993,49.276 h1.27 r90; Top Overlay "1" at 70.993,35.052 h1.27 r90
SPDT_1_1: Top Overlay "6" at 98.552,78.232 h1.27; Top Overlay "10" at 112.776,78.232 h1.27; Top Overlay "5" at 112.776,75.692 h1.27; Top Overlay "1" at 98.552,75.692 h1.27
SPDT_1_2: Top Overlay "6" at 98.552,65.532 h1.27; Top Overlay "10" at 112.776,65.532 h1.27; Top Overlay "5" at 112.776,62.992 h1.27; Top Overlay "1" at 98.552,62.992 h1.27
SPDT_2_1: Top Overlay "6" at 98.552,52.324 h1.27; Top Overlay "10" at 112.776,52.324 h1.27; Top Overlay "5" at 112.776,49.784 h1.27; Top Overlay "1" at 98.552,49.784 h1.27
SPDT_2_2: Top Overlay "6" at 98.552,39.37 h1.27; Top Overlay "10" at 112.776,39.37 h1.27; Top Overlay "5" at 112.776,36.83 h1.27; Top Overlay "1" at 98.552,36.83 h1.27
SPDT_3_1: Top Overlay "6" at 98.552,25.781 h1.27; Top Overlay "10" at 112.776,25.781 h1.27; Top Overlay "5" at 112.776,23.241 h1.27; Top Overlay "1" at 98.552,23.241 h1.27
SPDT_3_2: Top Overlay "6" at 98.552,12.827 h1.27; Top Overlay "10" at 112.776,12.827 h1.27; Top Overlay "5" at 112.776,10.287 h1.27; Top Overlay "1" at 98.552,10.287 h1.27